# Altium PCB Buck.PcbDoc
Units mil, origin at the board's own origin, x right, y up, seen from the top; angles counter-clockwise.
Board outline 2795 x 1005 mil, 2 copper layers (Top Layer, Bottom Layer); 15 components, 5 nets, 30 pads, 37 vias.
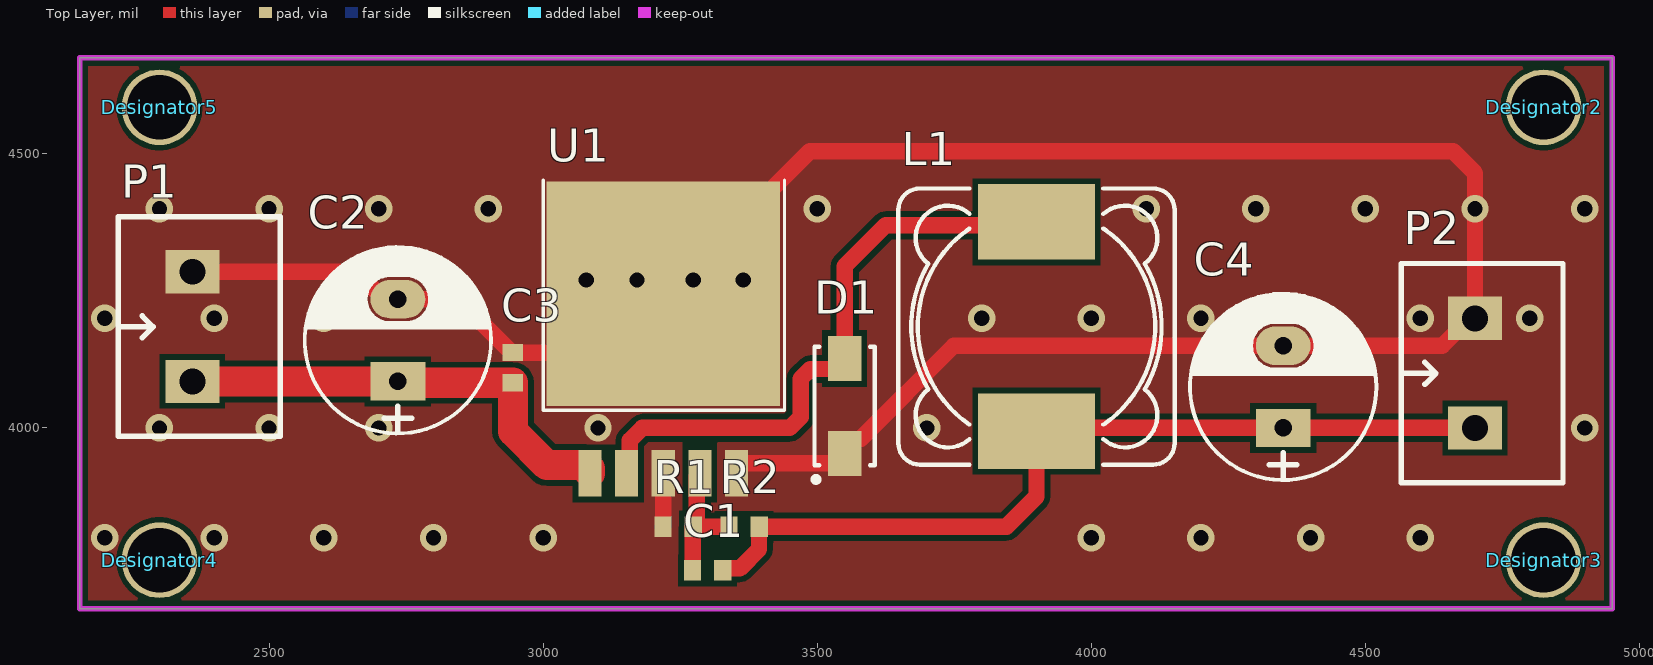
[diagram p0: Top Layer view]
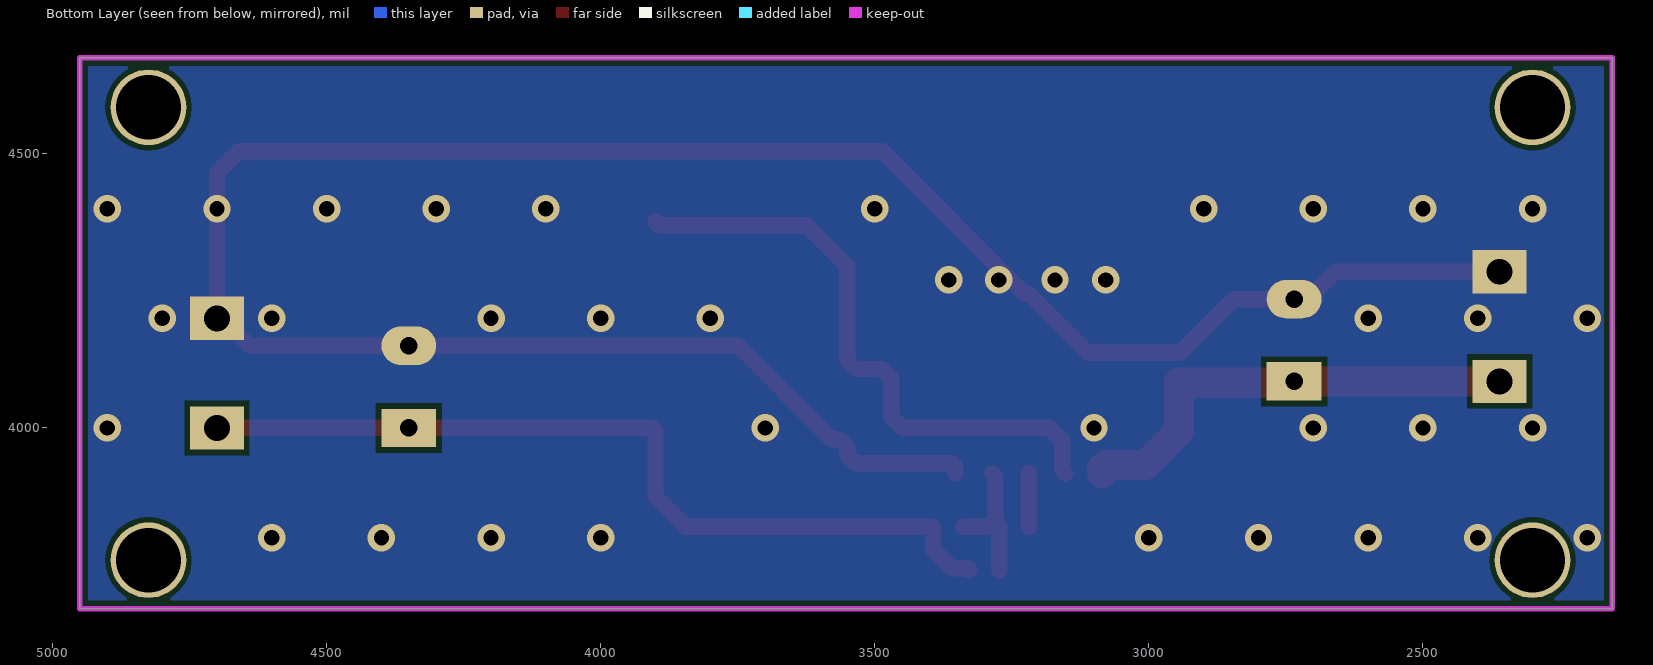
[diagram p1: Bottom Layer view, seen from below]
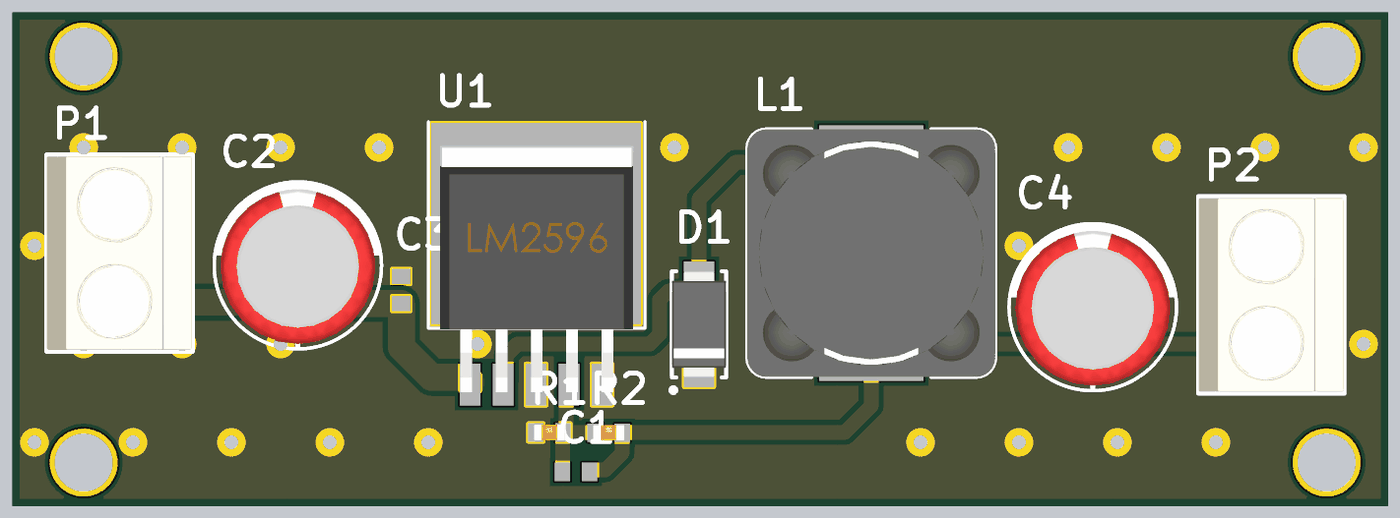
[diagram p2: 3D render of the assembled board from above, using the file's embedded part models]

## Layer stack, top to bottom
Top Solder: solder mask 0.4, Solder Resist, Dk 3.5
Top Layer: signal copper 1.4
Dielectric 1: dielectric 12.6, FR-4, Dk 4.8
Bottom Layer: signal copper 1.4
Bottom Solder: solder mask 0.4, Solder Resist, Dk 3.5

## Board outline
2155,3670 2155,4675 4950,4675 4950,3670

## Design rules (kind name [scope] priority, off if disabled: settings)
Clearance [All] p1: gap=10 ignorepadtopadclearanceinfootprint=FALSE except(0: Arc-Hole Track-Hole SMDPad-Hole THPad-Hole Via-Hole Fill-Hole Poly-Hole Region-Hole Text-Hole)
PolygonConnect [All] p1: connectstyle=Direct reliefconductorwidth=10 reliefentries=4 polygonreliefangle="90 Angle" airgapwidth=10
RoutingVias [All] p1: holewidth=28 width=50 viastyle="Through Hole" minholewidth=28 minwidth=50 maxholewidth=28 maxwidth=20
SolderMaskExpansion [All] p1: expansion=4
Width [All] p1: maxlimit=55 minlimit=10 preferedwidth=30 minimp=50.000000 maximp=50.000000 favimp=50.000000
30 further rules are at their usual default settings.

## Classes and differential pairs
component class Buck: C1 C2 C3 C4 D1 L1 P1 P2 R1 R2 U1

## Components (designator, comment, footprint, x,y, rotation, side; value= is the part's Value field where it differs from the comment)
C1 "Cap Non-Pol SMD" CAP-SM-0603 3300,3740 r0 top value=100nF/16V
C2 "Cap Pol" CP1.5/3.4 2735,4085 r90 top value=100nF/16V
C3 "Cap Non-Pol SMD" CAP-SM-0603 2945,4110 r270 top value=100uF/16V
C4 "Cap Pol" CP1.5/3.4 4350,4000 r90 top value=10uF/16v
D1 "D Schottky" SS34 3550,4040 r90 top
Designator2 "Comment" "LO KHOAN 3MM" 4825,4585 r0 top
Designator3 "Comment" "LO KHOAN 3MM" 4825,3758.7 r0 top
Designator4 "Comment" "LO KHOAN 3MM" 2300,3758.7 r0 top
Designator5 "Comment" "LO KHOAN 3MM" 2300,4585 r0 top
L1 "Inductor" "INDUCTOR 12.5x12.5" 3900,4185 r270 top value=22uH/3A
P1 "Domino 2" "DOMINO 2- 5mm" 2360,4185 r90 top
P2 "Domino 2" "DOMINO 2- 5mm" 4700,4100 r90 top
R1 "RESISTOR SMD" RES-SM-0603 3219.06,3820 r0 top value=1K
R2 "RESISTOR SMD" RES-SM-0603 3339.63,3819.63 r0 top value=3K
U1 "LM2596" LM2596 3085.2,3917.24 r0 top

## Footprints (in the part's own frame and the unit in brackets; to place one, negate y for a bottom-side part, rotate by r counter-clockwise, add the part's x,y. Pads: shape width x height; smd on the part's side, far side on the other; paste and mask are expansions set on the pad)
CAP-SM-0603 [mm] "SMD Ceramic Capacitor Size 0603"
  rect 0.8x0.95 smd: 1(-0.7,0) 2(0.7,0)
  body extent -0.85,-0.45 0.85,0.45, height 0.6
CP1.5/3.4 [mil] "Tu hoa 220->470uF,16V, 470uF/16V,25V"
  rect 70x100 hole 32: 1(0,0)
  oval 70x100 hole 32: 2(150,0)
  silkscreen extent -95,-170 245,170, body extent -85,-157 230,157, height 446
"DOMINO 2- 5mm" [mm]
  rect 2x2.5 hole 1.2: 1(-2.54,0) 2(2.54,0)
  silkscreen extent -5.08,-4.08 5.08,3.43, body extent -5,-4.07 5,3.43, height 10
"INDUCTOR 12.5x12.5" [mm] "SMD Inductor  Body Width 12.5mm Body Lenght 12.5mm Height 8mm"
  rect 3.5x5.4 smd: 1(-4.85,0) 2(4.85,0)
  silkscreen extent -6.4,-6.4 6.4,6.4, body extent -6.4,-6.4 6.4,6.4, height 8
LM2596 [mm]
  rect 1.07x2.16 smd: 1(0,0) 2(1.7,0) 3(3.4,0) 4(5.1,0) 5(6.8,0)
  rect 10.8x10.41 smd: 6(3.4,8.325)
  silkscreen extent -2.16,2.92 9.02,13.59, body extent -1.57,-0.39 8.43,12.36, height 4.3
"LO KHOAN 3MM" [mil]
  round 138 hole 118.1: 1(0,0)
RES-SM-0603 [mm]
  rect 0.8x0.95 smd: 1(-0.014,0) 2(1.386,0)
  body extent -0.11,-0.4 1.49,0.4, height 0.3
SS34 [mm] "DO-214-AC/SMA Molded Diode, Body 5.3x2.6mm, IPC Medium Density"
  rect 2.1x1.55 smd: 1(-2.2,0) 2(2.2,0)
  silkscreen extent -3.52,-1.4 2.75,1.45, body extent -2.75,-1.4 2.75,1.4, height 2.3

## Part data
C1 C3: "Capacitor"
C2 C4: "Polarized Capacitor (Radial)"
D1: "Schottky Diode", Code_JEDEC=DO-214-AA, LatestRevisionDate=17-Jul-2002, LatestRevisionNote="Re-released for DXP Platform.", PackageDescription="DO-214-AA/SMB; 2 C-Bend Leads; Body 5.3 x 3.6 mm, inc. leads (LxW)", PackageReference=SMB, Published=8-Jun-2000, Publisher="Altium Limited"
P1 P2: "Domino, 2-Pin", LatestRevisionDate=17-Jul-2002, LatestRevisionNote="Re-released for DXP Platform.", Publisher="Altium Limited"
R1 R2: "Resistor"
U1: "SMD"

## Via types
v1: diameter 50, hole 28, Top Layer to Bottom Layer, 37 vias

## Nets (pads, with @x,y where several pads share a name; then routed paths per layer and width w, separated by ;. In a path a pad name is that pad's centre, name@x,y a point inside that pad or via, vN(x,y) a via of type N, cw(c..) or ccw(c..) an arc to the next point about the centre after c; other vN are vias at no path point)
GND: C2.2 C3.1 C4.2 D1.1 P1.2 P2.2 R1.1 U1.3 U1.5 U1.6 | length 4411.4
  Top Layer w30: P1.2 2659.18,4285 2709.18,4235 C2.2 2844.61,4235 2942.05,4137.56 C3.1 3111.61,4137.56 U1.6 3226.73,4245 3486.73,4505 4660,4505 4700,4465 P2.2 4690.16,4200 4640.16,4150 C4.2 3749.17,4150 3578.9,3979.72 3565.51,3979.72 3550,3964.21 D1.1 3550,3950.83 3534.49,3935.31 3358.98,3935.31 3352.91,3929.25 U1.5 ; R1.1 3218.78,3820.28 3218.78,3916.96 U1.3
  other v1: 2200,3800 2400,3800 2600,3800 2800,3800 3000,3800 4000,3800 4200,3800 4400,3800 4600,3800 2300,4000 2500,4000 2700,4000 3100,4000 3700,4000 4900,4000 2200,4200 2400,4200 2600,4200 3800,4200 4000,4200 4200,4200 4600,4200 4800,4200 3078.76,4270 3171.19,4270 3273.8,4270 3364.81,4270 2300,4400 2500,4400 2700,4400 2900,4400 3500,4400 4100,4400 4300,4400 4500,4400 4700,4400 4900,4400
NetC1_1: C1.1 R1.2 R2.1 U1.4 | length 248.5
  Top Layer w30: C1.1 3273.03,3740.59 3273.03,3819.41 R1.2 ; U1.4 3280.39,3911.65 3280.39,3829.72 3273.61,3822.95 R1.2 ; R2.1 3338.88,3819.81 3273.8,3819.81 R1.2
NetC1_2: C1.2 C4.1 L1.2 P2.1 R2.2 | length 1575.6
  Top Layer w30: C1.2 3327.56,3742.95 3328.31,3743.7 3358.98,3743.7 3393.81,3778.54 3393.81,3819.25 3394.56,3820 3845.28,3820 3900,3874.72 L1.2 3905.94,4000 C4.1 P2.1
NetC2_1: C2.1 C3.2 P1.1 U1.1 | length 851.5
  Top Layer w55: P1.1 C2.1 2737.56,4082.44 C3.2 2945,3994.06 3006.79,3932.26 3078.76,3932.26 3085.2,3925.83 U1.1
NetD1_2: D1.2 L1.1 U1.2 | length 1111.2
  Top Layer w30: U1.2 3158.19,3923.31 3158.19,3977.24 3180.94,4000 3450,4000 3470,4020 3470,4090 3487.57,4107.57 3534.49,4107.57 3550,4123.09 D1.2 3550,4295 3625,4370 3894.06,4370 L1.1
pads on no net: Designator2.1 Designator3.1 Designator4.1 Designator5.1

## Polygon pours and split planes (outlines as drawn)
GND on Top Layer "Top Layer-No Net" (solid, remove dead copper, pour order 0): 2155,3670 2155,4675 4950,4675 4950,3670
GND on Bottom Layer "Top Layer-No Net1" (solid, remove dead copper, pour order 1): 2155,3670 2155,4675 4950,4675 4950,3670

## Keep-outs
Keep-Out Layer:
  the board outline again, w10